# Altium PCB ShieldBoard.PcbDoc
Units mil, origin at the board's own origin, x right, y up, seen from the top; angles counter-clockwise.
Board outline 2705 x 2100 mil, 2 copper layers (Top Layer, Bottom Layer); 15 components, 31 nets, 62 pads, 13 vias.
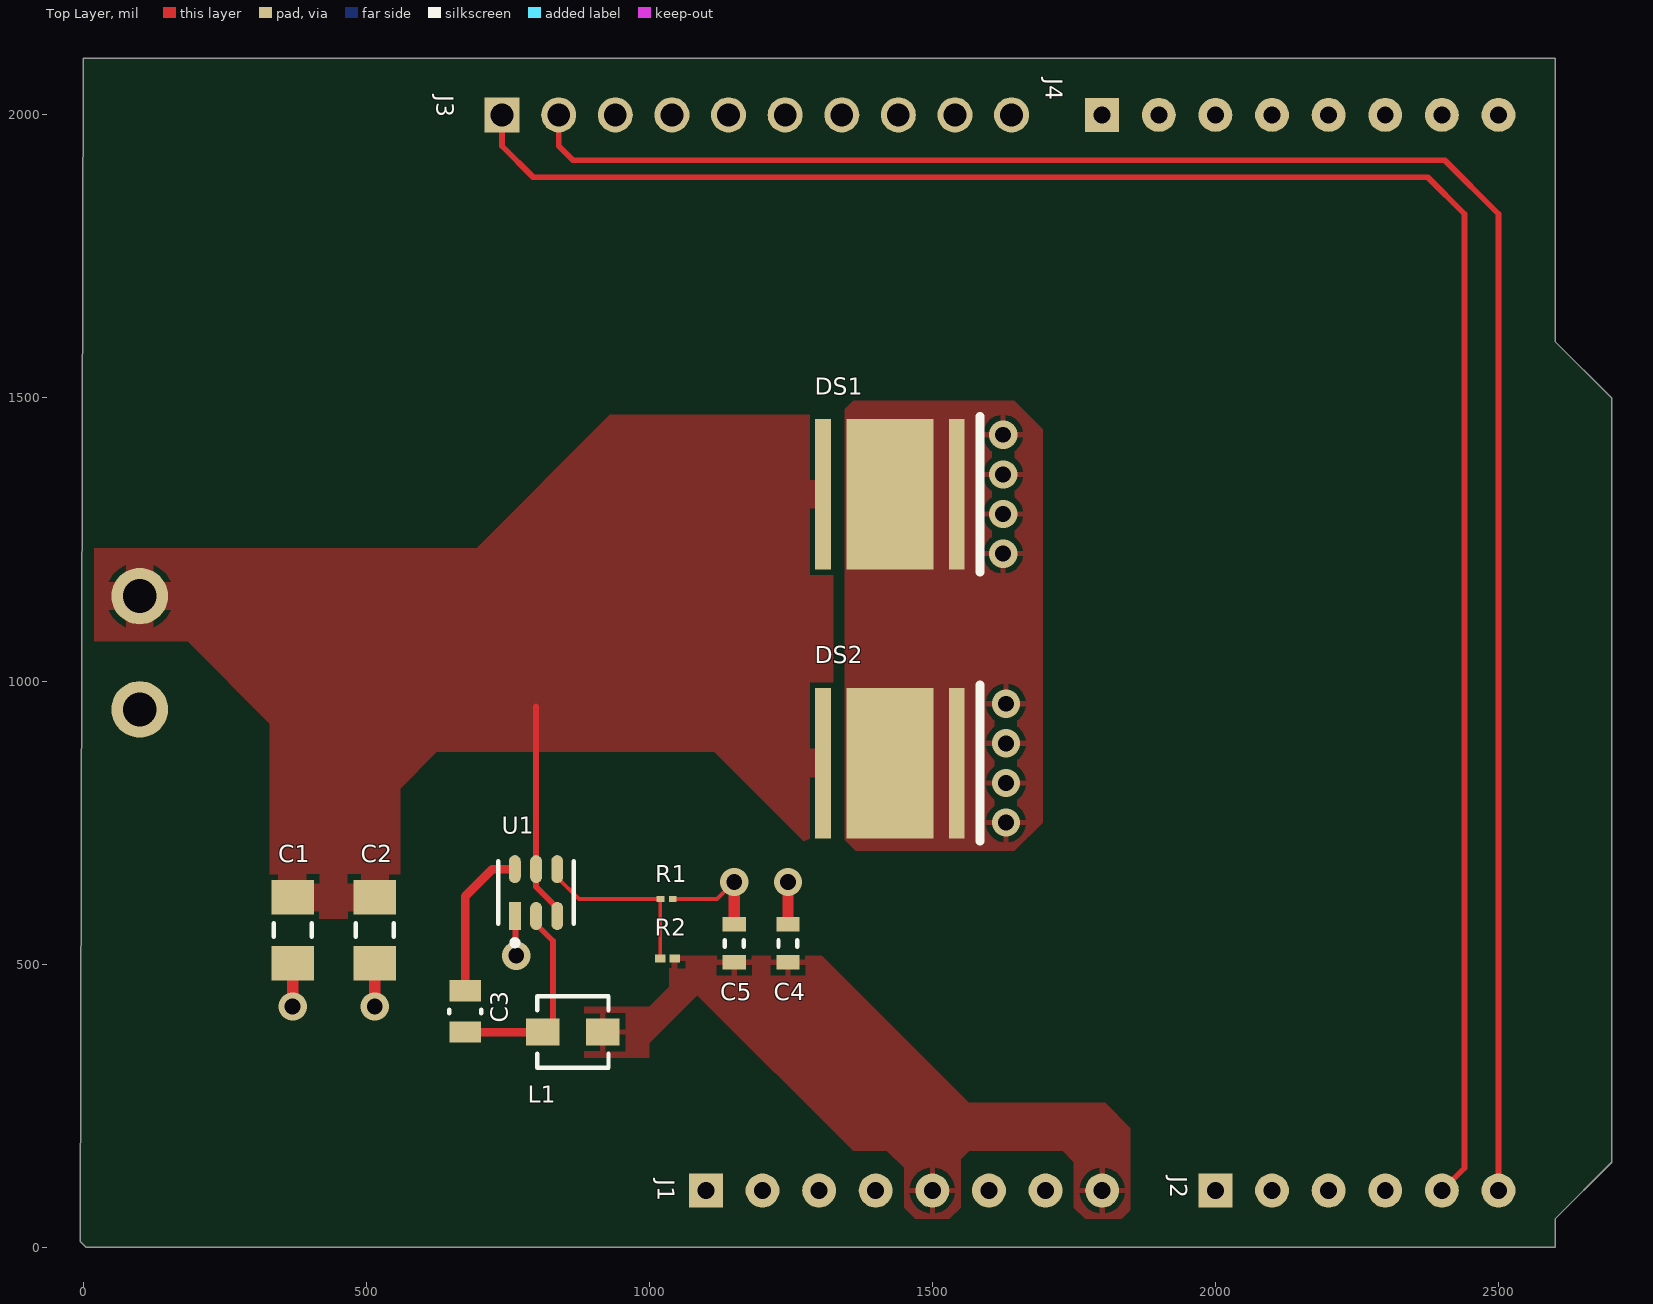
[diagram p0: Top Layer view]
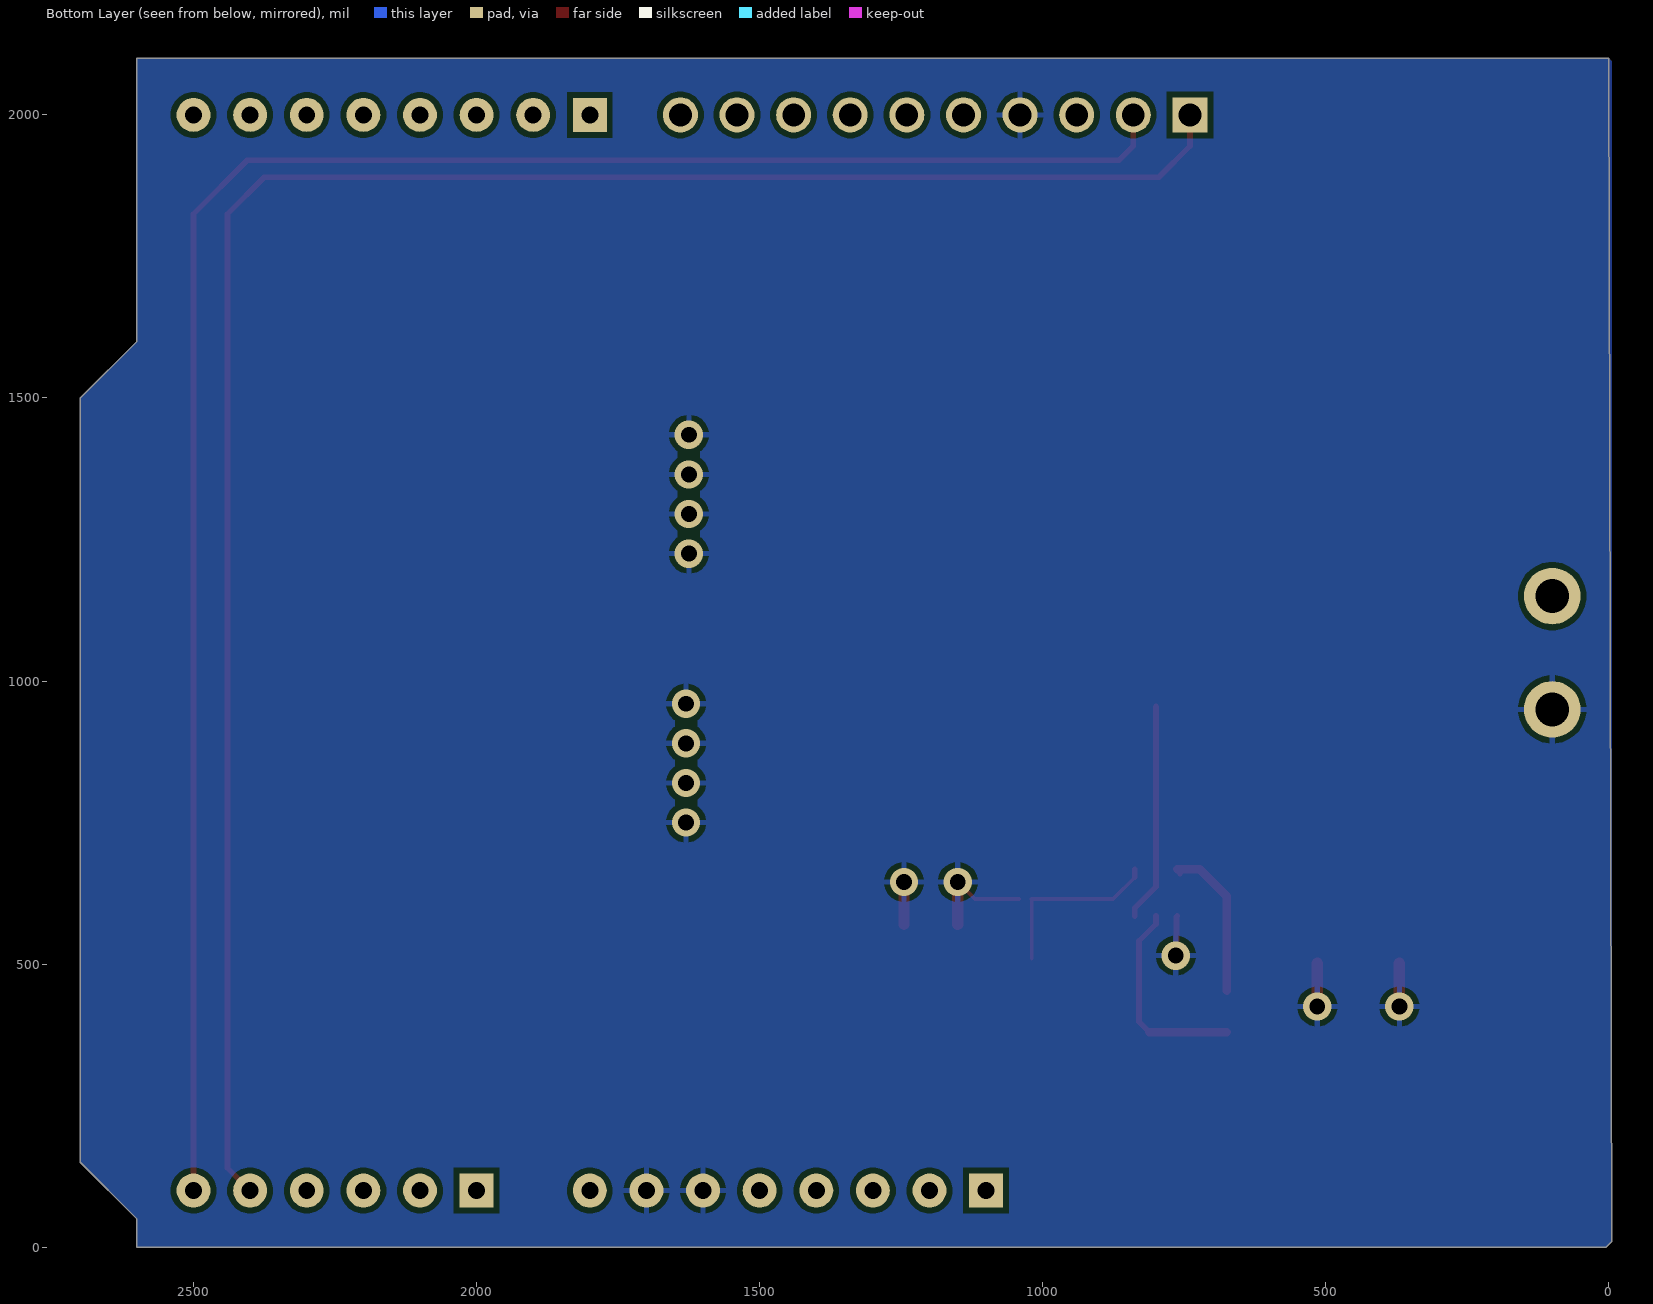
[diagram p1: Bottom Layer view, seen from below]

## Layer stack, top to bottom
Top Solder: solder mask 0.4, Solder Resist, Dk 3.5
Top Layer: signal copper 1.4
Dielectric 1: dielectric 12.6, FR-4, Dk 4.8
Bottom Layer: signal copper 1.4
Bottom Solder: solder mask 0.4, Solder Resist, Dk 3.5

## Board outline
-5,10 5,0 2600,0 2600,50 2700,150 2700,1500 2600,1600 2600,2100 0,2100

## Design rules (kind name [scope] priority, off if disabled: settings)
Clearance [All] p1: gap=10 ignorepadtopadclearanceinfootprint=TRUE
PolygonConnect [All] p1: connectstyle=Relief reliefconductorwidth=10 reliefentries=4 polygonreliefangle="90 Angle" airgapwidth=10
RoutingVias [All] p1: holewidth=10 width=18 viastyle="Through Hole" minholewidth=6 minwidth=14 maxholewidth=28 maxwidth=50
SolderMaskExpansion [All] p1: expansion=4 istentingtop=FALSE
SupplyNets "Schematic Supply Nets_1" [InNet('GND')] p1: voltage=0.000
SupplyNets "Schematic Supply Nets" [InNet('+12')] p2: voltage=0.000
Width [All] p1: maxlimit=30 minlimit=5 preferedwidth=10
30 further rules are at their usual default settings.

## Components (designator, comment, footprint, x,y, rotation, side; value= is the part's Value field where it differs from the comment)
C1 "GRM31CR61E106KA12L" CAPC3216X180X55ML20T25 370,560 r270 top
C2 "GRM31CR61E106KA12L" CAPC3216X180X55ML20T25 515,560 r270 top
C3 "CC0805KRX7R8BB104" FP-CC0805-0_85-MFG 675,416.42 r270 top value="100 nF"
C4 "C1608X5R1A226M080AC" CAPC1608X100X20ML10 1245,536.54 r90 top
C5 "C1608X5R1A226M080AC" CAPC1608X100X20ML10 1150,536.54 r90 top
DS1 "MKRAWT-00-0000-0D0HG235H" CREE-MK-R-2_V 1425,1330 r0 top
DS2 "MKRAWT-00-0000-0D0HG235H" CREE-MK-R-2_V 1425,855 r0 top
J1 "SSQ-108-03-T-S" SSQ-108-03-T-S-Footprint-1 1100,100 r0 top
J2 "SSQ-106-03-T-S" SSQ-106-03-T-S-Footprint-1 2000,100 r0 top
J3 "SSQ-110-03-T-S" FP-SSQ-110-03-T-S-MFG 1190,2000 r0 top
J4 "SSQ-108-03-T-S" SSQ-108-03-T-S-Footprint-1 1800,2000 r0 top
L1 "IHLP1212BZER3R3M11" FP-IHLP-1212BZ-11-MFG 865,380 r0 top
R1 "CRCW020110K0FKED" RESC0603X28X15LL05T05 1030.83,615 r0 top value=10kΩ
R2 "CRCW020156K2FKED" RESC0603X28X15NL05T05 1032.2,510 r180 top value="56.2 kΩ"
U1 "TPS562201DDCR" FP-DDC0006A-IPC_C 800,626.35 r90 top

## Footprints (in the part's own frame and the unit in brackets; to place one, negate y for a bottom-side part, rotate by r counter-clockwise, add the part's x,y. Pads: shape width x height; smd on the part's side, far side on the other; paste and mask are expansions set on the pad)
CAPC1608X100X20ML10 [mm] "Chip Capacitor, 2-Leads, Body 1.70x0.90mm, IPC Low Density"
  rect 0.65x1.05 smd: 1(-0.85,0) 2(0.85,0)
  silkscreen extent -0.15,-0.43 0.15,0.43, body extent -0.85,-0.45 0.85,0.45, height 1
CAPC3216X180X55ML20T25 [mm] "Chip Capacitor, 2-Leads, Body 3.4x1.8mm, IPC Low Density"
  rect 1.55x1.9 smd: 1(-1.475,0) 2(1.475,0)
  silkscreen extent -0.3,-0.85 0.3,0.85, body extent -1.7,-0.9 1.7,0.9, height 1.8
CREE-MK-R-2_V [mm] "SMD, 2-Leads, Body 7x7mm, Thermal Pad 3.9x6.76mm"
  rect 0.7x6.76 smd: 1(-3,0) 2(3,0)
  rect 3.9x6.76 smd: 3(0,0)
  silkscreen extent 4.05,-3.5 4.05,3.5, body extent -3.5,-3.5 3.5,3.5, height 4.1
FP-CC0805-0_85-MFG [mm]
  rect 0.95x1.4 smd paste+0 mask+0: 1(-0.925,0) 2(0.925,0)
  silkscreen extent -0.08,-0.72 0.08,0.72, body extent -1.6,-1.05 1.6,1.05, height 0.25
FP-DDC0006A-IPC_C [mm]
  rect 1.254x0.532 smd paste+0 mask+0: 1(-1.05,0.95)
  rrect100% 1.254x0.532 smd paste+0 mask+0: 2(-1.05,0) 3(-1.05,-0.95) 4(1.05,-0.95) 5(1.05,0) 6(1.05,0.95)
  silkscreen extent -2.37,-1.7 1.4,1.7, body extent -1.78,-1.55 1.78,1.55, height 0.25
FP-IHLP-1212BZ-11-MFG [mm]
  rect 1.5x1.2 smd paste+0 mask+0: 1(-1.35,0) 2(1.35,0)
  silkscreen extent -1.6,-1.6 1.6,1.6, body extent -2.2,-1.7 2.2,1.7, height 0.25
FP-SSQ-110-03-T-S-MFG [mm]
  rect 1.57x1.57 hole 1.02: 1(-11.43,0)
  round 1.57 hole 1.02: 2(-8.89,0) 3(-6.35,0) 4(-3.81,0) 5(-1.27,0) 6(1.27,0) 7(3.81,0) 8(6.35,0) 9(8.89,0) 10(11.43,0)
RESC0603X28X15LL05T05 [mm] "Chip Resistor, 2-Leads, Body 0.60x0.30mm, IPC High Density"
  rect 0.35x0.25 smd: 1(-0.275,0) 2(0.275,0)
  body extent -0.33,-0.17 0.32,0.18, height 0.28
RESC0603X28X15NL05T05 [mm] "Chip Resistor, 2-Leads, Body 0.60x0.30mm, IPC Medium Density"
  rect 0.45x0.35 smd: 1(-0.325,0) 2(0.325,0)
  body extent -0.33,-0.17 0.33,0.18, height 0.28
SSQ-106-03-T-S-Footprint-1 [mil]
  rect 60x60 hole 30: 1(0,0)
  round 60 hole 30: 2(100,0) 3(200,0) 4(300,0) 5(400,0) 6(500,0)
SSQ-108-03-T-S-Footprint-1 [mil]
  rect 60x60 hole 30: 1(0,0)
  round 60 hole 30: 2(100,0) 3(200,0) 4(300,0) 5(400,0) 6(500,0) 7(600,0) 8(700,0)

## Part data
C1 C2: library part CMP-2000-04947-1, "Chip Capacitor, 10 uF, +/- 10%, 25 V, -55 to 85 degC, 1206 (3216 Metric), RoHS, Tape and Reel", Capacitance=10uF, Case Code - in=1206, Case Code - mm=3216, Case Height=1.6mm, Case Length=3.2mm, Dielectric=X5R, Manufacturer=Murata, Maximum Operating Temperature=+85C, Minimum Operating Temperature=-55C, Package / Case=1206(3216metric), Package Description="2-Pin Surface Mount Device, Body 3.2 x 1.6 mm", Tolerance=10%, Voltage Rating DC=25V, Brand=MurataElectronics, Case Width=1.6mm, Datasheet URL=https://datasheet.ciiva.com/11786/0900766b80ef921d-11786983.pdf, Datasheet Version=Sep-13, Factory Pack Quantity=2000, Manufacturer URL=http://www.murata.com/, Package Reference=1206, Packaging=Reel, Product=GeneralTypeMLCCs, Product Category=MultilayerCeramicCapacitorsMLCC-SMD/SMT, RoHS=Details, Series=GRM, Termination Style=SMD/SMT, Type=GeneralPurposeMLCC
C3: library part CMP-1036-04410-2, "CAP CER 0.1UF 25V X7R 0805", Capacitance="100 nF", Manufacturer=Yageo, Package=CC0805-0.85, Temperature="-30°C to +85°C", Temperature Characteristic=X7R, Temperature Range High=+85°C, Temperature Range Low=-30°C, Tolerance=0.1, Voltage Rating="25 V", Automotive=No, Category=Cap, ComponentLink2Description=Datasheet, ComponentLink2URL=http://www.yageo.com/documents/recent/UPY-GPHC_Y5V_6.3V-to-50V_8.pdf, Device Class L1="Passive Components", Device Class L2=Capacitors, Device Class L3="Ceramic Capacitors", Digikey Description="CAP CER 0.1UF 25V X7R 0805", Footprint Url=http://www.yageo.com/exep/pages/download/literatures/UPY-C_GEN_24.pdf, Height=0.95mm, Ipc Land Pattern Name=CAPC200125X85, Lead Free=Yes, Manufacturer Part Number=CC0805KRX7R8BB104, Material=Ceramic, Mouser Description="Multilayer Ceramic Capacitors MLCC - SMD/SMT 100nF 25V X7R 10%", Octopart=https://octopart.com/cc0805krx7r8bb104-yageo-39467766, RoHS=TRUE
C4 C5: library part CMP-2000-05441-1, "Chip Capacitor, 22 uF, +/- 20%, 10 V, -55 to 85 degC, 0603 (1608 Metric), RoHS, Tape and Reel", Capacitance=22µF, Manufacturer=TDK, Operating Temperature=-55degC~85degC, Package / Case=0603(1608Metric), Package Description="2-Pin Surface Mount Device, Body 1.6 x 0.8 mm", Package Reference=603, PCN Part Number=MLCCPartNumberChange30/Nov/2012, Ratings=-, Standard Package=1, Temperature Coefficient=X5R, Tolerance=±20%, Voltage - Rated=10V, Applications=GeneralPurpose, Category=Capacitors, Datasheet URL=http://download.siliconexpert.com/pdfs/2015/4/21/15/54/45/779/tdk_/manual/37024850441143360mlcc_commercial_general_en.pdf, Datasheet Version=Mar-15, Design Resources=20WNon-IsolatedBuckLEDDriverUsingPLLNK460KG, Family=CeramicCapacitors, Features=-, Height - Seated (Max)=-, Kits=445-9014-KIT-ND-KITMLCC100PF-22UF060310-50V, Lead Spacing=-, Lead Style=-, Manufacturer URL=http://www.tdk.com/, Mounting Type=SurfaceMount,MLCC, Online Catalog=CSeries,GeneralPurpose, Other Names=445-9077-1, Packaging=CutTape(CT), Product Training Modules=CSeriesGeneralApplicationsSEAT,CCV,andTVCLDesignToolsGuidetoReplacinganElectrolyticCapacitorwithanMLCC, RoHS Information=RoHSCertificate-MLCC, Series=C, Size / Dimension="0.063\"Lx0.031\"W(1.60mmx0.80mm)", Thickness (Max)="0.035\"(0.90mm)"
DS1 DS2: library part CMP-2100-00977-1, "LED, White, 12 V, 2-Pin SMD, RoHS, Tape and Reel"
J1 J4: library part CMP-002-00076-2, "Board Connector, 8 Contact(s), 1 Row(s), Female, Straight, 0.1 inch Pitch, Solder Terminal, Black Insulator, Socket", Max Operating Temperature=105°C, Min Operating Temperature=-65°C, Connector Type="BOARD CONNECTOR", Mounting Technology=Board, RoHS Compliant=Yes
J2: library part CMP-002-00078-1, "Board Connector, 6 Contact(s), 1 Row(s), Female, Straight, 0.1 inch Pitch, Solder Terminal, Locking, Black Insulator, Socket", Max Operating Temperature=105°C, Min Operating Temperature=-65°C, Connector Type="BOARD CONNECTOR", Mounting Technology=Board, RoHS Compliant=Yes
J3: library part CMP-002-00079-2, "Board Connector, 10 Contact(s), 1 Row(s), Female, Straight, 0.1 inch Pitch, Solder Terminal, Black Insulator, Socket", Max Operating Temperature=105°C, Min Operating Temperature=-65°C, Connector Type="BOARD CONNECTOR", Mounting Technology=Board, RoHS Compliant=Yes
L1: library part CMP-02424-000857-1, "FIXED IND 3.3UH 2.7A 61 MOHM SMD", Case Code (Imperial)=1212, Case Code (Metric)=3630, Current Rating=2.7A, DC Resistance (DCR)=61mR, Inductance=3.3uH, Inductance Tolerance=20%, Max Operating Temperature=125°C, Min Operating Temperature=-55°C, Package Quantity=3000, Saturation Current=3.3A, Self Resonant Frequency=45MHz, Test Frequency=100kHz, Case/Package=1212, Contact Plating=Tin, Core Material=Ferrite, Depth=3.2mm, Height=2mm, Height - Seated (Max)=0.079inch, Lead Free="Lead Free", Length=0.144inch, Max DC Current=2.7A, Military Standard=Not, Mount="Surface Mount", Number of Pins=2, Packaging="Tape and Reel", Radiation Hardening=No, RMS Current (Irms)=2.7A, Series=IHLP-1212BZ-11, Shielding=Shielded, Termination=SMD/SMT, Tolerance=20%, Width=0.118inch
R1: library part CMP-2004-00015-1, Manufacturer="Vishay Dale", Part Number=CRCW020110K0FKED
R2: library part CMP-2004-00722-1, Manufacturer="Vishay Dale", Part Number=CRCW020156K2FKED
U1: library part CMP-04918-000361-1, "IC REG BUCK ADJ 2A TSOT23-6", Case/Package=SOT, Max Input Voltage=17V, Max Operating Temperature=125°C, Max Output Current=2A, Min Input Voltage=4.5V, Min Operating Temperature=-40°C, Output Voltage=7V, Quiescent Current=400uA, Switching Frequency=580kHz, Contact Plating=Tin, Lead Free="Lead Free", Mount="Surface Mount", Number of Outputs=1, Number of Pins=6, Operating Supply Voltage=17V, Output Type=Adjustable, RoHS Compliant=Yes

## Free pads (board coordinates)
  round 100 hole 60: 7(100,1150) 8(100,950)

## Via types
v1: diameter 50, hole 28, Top Layer to Bottom Layer, 13 vias

## Nets (pads, with @x,y where several pads share a name; then routed paths per layer and width w, separated by ;. In a path a pad name is that pad's centre, name@x,y a point inside that pad or via, vN(x,y) a via of type N, cw(c..) or ccw(c..) an arc to the next point about the centre after c; other vN are vias at no path point)
3.3V: J1.4
5V: C4.1 C5.1 J1.5 J1.8 L1.2 R2.1
+12: C1.1 C2.1 DS1.1 DS2.1 pad.7 U1.3 U1.5 | length 385.5
  Top Layer w10: 800,955 U1.5 800,636.62 811.93,624.69 837.4,599.22 U1.3
A0: J2.1
A1: J2.2
A2: J2.3
A3: J2.4
A4: J2.5 J3.1 | length 3546.3
  Top Layer w10: J3.1 740,1945 795,1890 2375,1890 2440,1825 2440,140 J2.5
A5: J2.6 J3.2 | length 3489.7
  Top Layer w10: J3.2 840,1945 865,1920 2405,1920 2500,1825 J2.6
AREF: J3.3
D0: J4.8
D1: J4.7
D2: J4.6
D3: J4.5
D4: J4.4
D5: J4.3
D6: J4.2
D7: J4.1
D8: J3.10
D9: J3.9
D10: J3.8
D11: J3.7
D12: J3.6
D13: J3.5
GND: C1.2 C2.2 C4.2 C5.2 DS1.2 DS1.3 DS2.2 DS2.3 J1.6 J1.7 J3.4 pad.8 R1.2 U1.1 | length 495.6
  Top Layer w7: R1.2 1120,615 v1(1150,645)
  Top Layer w10: U1.1 763.8,583.8 763.8,516.2 v1(765,515)
  Top Layer w20: v1(370,425) C1.2 ; v1(515,425) C2.2 ; C5.2 v1(1150,645) ; C4.2 v1(1245,645)
  other v1: 1630,750 1630,820 1630,890 1630,960 1625,1225 1625,1295 1625,1365 1625,1435
IOREF: J1.2
NC: J1.1
NetC3_1: C3.1 U1.6 | length 284.3
  Top Layer w10: U1.6@757.54,660 762.6,665.06 U1.6
  Top Layer w15: C3.1 675,620 722.7,667.7 U1.6
NetR1_1: R1.1 R2.2 U1.4 | length 318
  Top Layer w7: U1.4@837.4,653.48 875.88,615 R1.1 1019.41,614.41 R2.2
  Top Layer w10: U1.4@837.4,653.48 U1.4
RESET: J1.3
"SW OUT": C3.2 L1.1 U1.2 | length 361.8
  Top Layer w10: U1.2 800,570.78 830,540.78 830,398.15 L1.1
  Top Layer w15: C3.2 L1.1

## Polygon pours and split planes (outlines as drawn)
5V on Top Layer "5V_L01_P007" (solid, pour order 7): 1035,460 1000,425 885,425 885,335 1000,335 1000,360 1085,445 1360,170 1420.75,169.25 1450,140 1450,70 1470,50 1530,50 1550,70 1550,155 1565,170 1730,170 1750,150 1750,70 1770,50 1835,50 1850,65 1850,210 1805,255 1564.37,255 1304.37,515 1035,515
+12 on Top Layer "+12_L01_P006" (solid, pour order 6): 20,1070 185,1070 330,925 330,580 560,580 560,810 625,875 1115,875 1280,710 1325,710 1325,1470 930,1470 695,1235 20,1235
GND on Top Layer "GND_L01_P002" (solid, pour order 2): 1345,720 1365,700 1645,700 1695,750 1695,1445 1645,1495 1360,1495 1350,1485 1345,1480
GND on Bottom Layer "GND_L02_P001" (solid, pour order 1): 2600,0 2600,50 2700,150 2700,1500 2600,1600 2600,2100 0,2100 -5,2095 -5,10 5,0